# EAGLE board Control PCb (EAGLE 9.6.2)
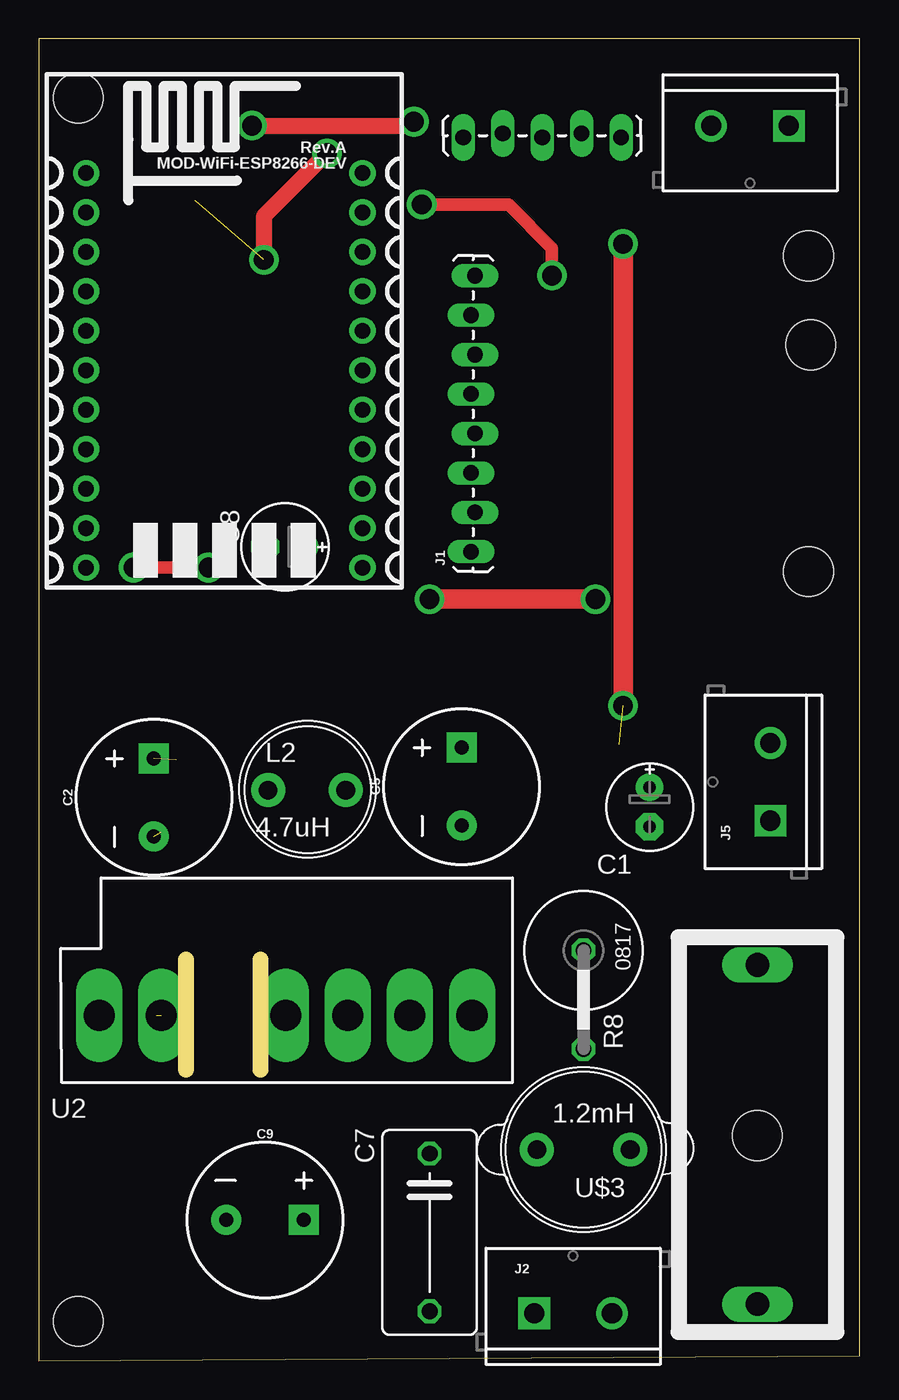
[diagram p0: board, top side]
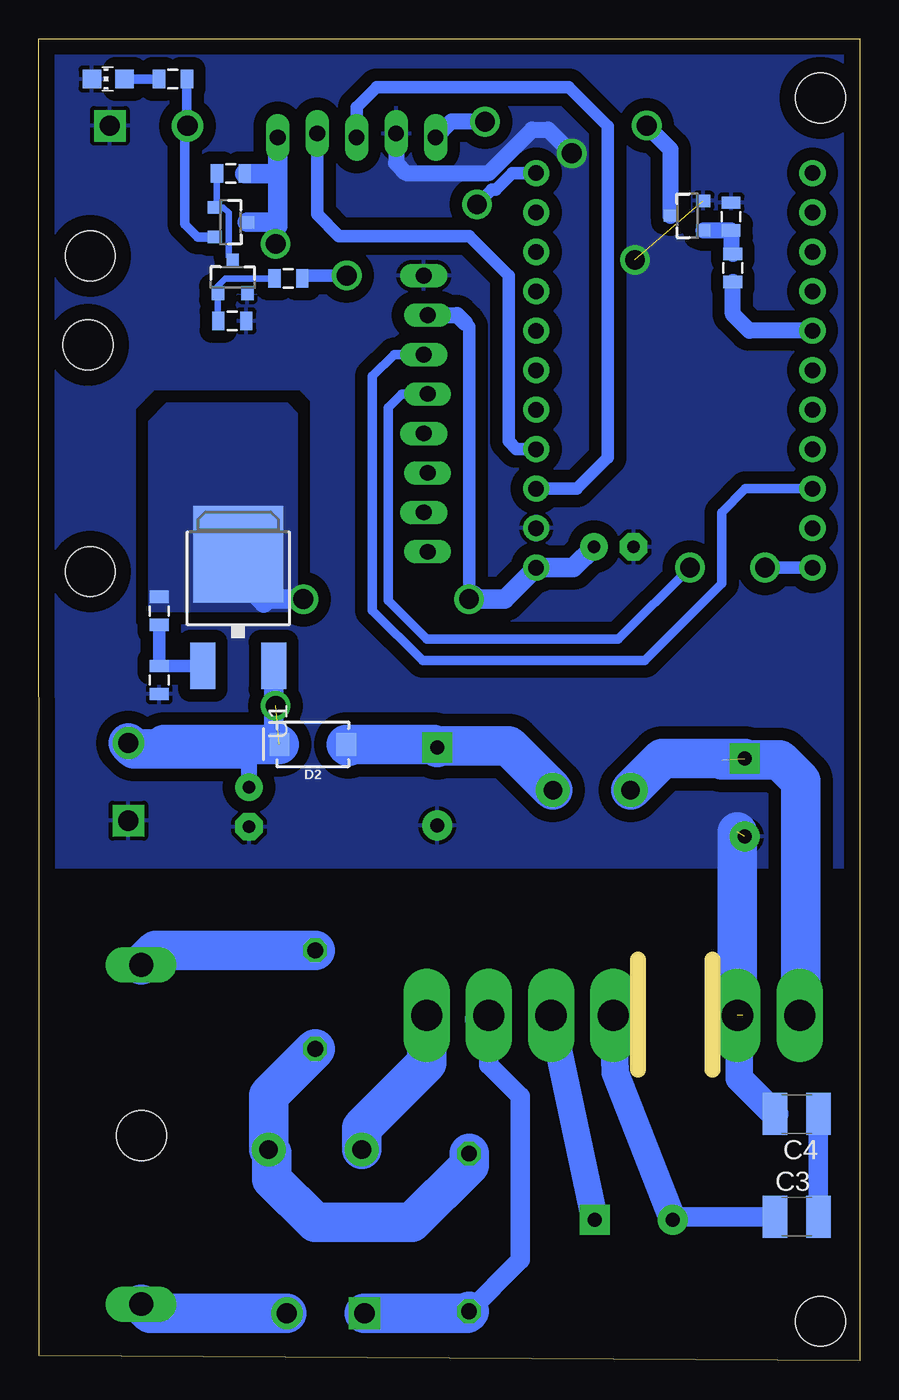
[diagram p1: board, bottom side, seen from below]

Size 52.83 x 85.09 mm. Coordinates in mm from the lower left corner, seen from the top.
Outline: 0,0 52.81,0.3 52.83,85.09 0,85.09 0,0
Copper layers (1*16): Top 0.035mm / dielectric 1.5mm / Bottom 0.035mm
Design rules "default": minimum track width 6mil, minimum drill 0.35mm, track to track 6mil, track to pad 6mil, pad to pad 6mil, via to via 6mil, smd to smd 6mil, copper to edge 40mil, drill to drill 6mil, minimum pad ring 10mil, minimum via ring 8mil, stop-mask expansion 4mil, vias tented up to drill 0mil, thermal gap 10mil
Holes 3.2 mm at 49.67,65.38 2.54,81.28 2.54,2.54 46.23,14.48 49.53,71.12 49.53,50.8

## Footprints (pad centres in the part's own frame; a part is rotated, then mirrored left to right if it is on the bottom)
E2,5-6E = drill 0.813 pad 1.778: + -1.27,0 | drill 0.813 pad 1.778 octagon: - 1.27,0
CPOL-RADIAL-5MM-10MM-KIT = drill 0.9 pad 1.93 square: + 2.5,0 | drill 0.9 pad 1.93: - -2.5,0
C1210 = smd 1.6 x 2.7: 1 -1.4,0; 2 1.4,0
C102-064X133 = drill 1.016 octagon: 1 -5.08,0; 2 5.08,0
CHIP_LED0805 = smd 1.2 x 1.2: A 0,-1.05; C 0,1.05
SMA-DIODE = smd 1.27 x 1.47: A -2.15,0; C 2.15,0
4527 = drill 1.524 long: 1 -10.922,0; 2 10.922,0
1X08_LOCK_LONGPADS = drill 1.016 long: 1 0,0.127; 2 2.54,-0.127; 3 5.08,0.127; 4 7.62,-0.127; 5 10.16,0.127; 6 12.7,-0.127; 7 15.24,0.127; 8 17.78,-0.127
SCREWTERMINAL-5MM-2 = drill 1.3 pad 2.032 square: 1 0,0 | drill 1.3 pad 2.032: 2 5,0
1X05_LOCK_LONGPADS = drill 1.016 long: 1 0,0; 2 2.54,-0.254; 3 5.08,0; 4 7.62,-0.254; 5 10.16,0
6000 = drill 1.2 pad 2.184: 1 -2.5,0; 2 2.5,0
SOT23 = smd 0.8 x 0.9: 1 -0.95,-1; 2 0.95,-1; 3 0,1.1
0805 = smd 0.8 x 1.2: 1 -0.9,0; 2 0.9,0
P0817V = drill 1.016 octagon: 1 -5.08,0; 2 1.27,0
V-REG_DPACK = smd 1.6 x 3: 1 -2.28,-4.8; 3 2.28,-4.8 | smd 5.8 x 6.2: 4 0,2.38
5ACFEW = drill 2 pad 2.5 long: 1 -12,0; 2 -8,0; 3 -4,0; 4 0,0; 5 8,0; 6 12,0
OLIMEX_MOD-WIFI-ESP8266-DEV-PINS-INSIDE = drill 1 pad 1.676: 1 2.54,0; 2 2.54,-2.54; 3 2.54,-5.08; 4 2.54,-7.62; 5 2.54,-10.16; 6 2.54,-12.7; 7 2.54,-15.24; 8 2.54,-17.78; 9 2.54,-20.32; 10 2.54,-22.86; 11 2.54,-25.4; 12 20.32,-25.4; 13 20.32,-22.86; 14 20.32,-20.32; 15 20.32,-17.78; 16 20.32,-15.24; 17 20.32,-12.7; 18 20.32,-10.16; 19 20.32,-7.62; 20 20.32,-5.08; 21 20.32,-2.54; 22 20.32,0
1800R = drill 1.2 pad 2.184: 1 -3,0; 2 3,0

## Placement (x,y rotation side)
C1  [E2,5-6E]  39.3,35.63 270 top
C2  470  [CPOL-RADIAL-5MM-10MM-KIT]  7.4,36.26 90 top
C3  [C1210]  4.06,9.27 0 bottom
C4  [C1210]  4.06,15.88 180 bottom
C5  100  [CPOL-RADIAL-5MM-10MM-KIT]  27.2,36.96 90 top
C7  0.1uF  [C102-064X133]  25.15,8.26 270 top
C8  [E2,5-6E]  15.84,52.39 180 top
C9  10uF  [CPOL-RADIAL-5MM-10MM-KIT]  14.55,9.06 0 top
D1  LED_GREEN  [CHIP_LED0805]  48.37,82.51 90 bottom
D2  3A/40V/500mV  [SMA-DIODE]  35.2,39.67 180 bottom
F1  4527  [4527]  46.25,14.56 90 top
J1  [1X08_LOCK_LONGPADS]  27.94,52.07 90 top
J2  [SCREWTERMINAL-5MM-2]  31.88,3.05 0 top
J3  [1X05_LOCK_LONGPADS]  37.47,78.74 180 top
J5  [SCREWTERMINAL-5MM-2]  47.07,34.76 90 top
J6  [SCREWTERMINAL-5MM-2]  48.27,79.49 180 top
L2  4.7uH  [6000]  17.25,36.73 0 top
Q1  DMP2305U-7  [SOT23]  40.51,73.28 270 bottom
Q2  BSS123  [SOT23]  40.36,69.72 0 bottom
Q3  BSS123  [SOT23]  11.08,73.71 90 bottom
R1  0  [0805]  36.78,69.67 180 bottom
R2  0  [0805]  40.48,76.42 0 bottom
R3  0  [0805]  44.21,82.51 0 bottom
R4  0  [0805]  8.18,70.34 90 bottom
R6  0  [0805]  45.09,43.81 90 bottom
R7  0  [0805]  45.09,48.26 90 bottom
R8  12/3W  [P0817V]  35.05,21.34 270 top
R9  0  [0805]  40.39,66.93 180 bottom
R10  0  [0805]  8.29,73.64 270 bottom
U1  V_REG_317DPACK  [V-REG_DPACK]  40.01,49.53 0 bottom
U2  5ACFEW  [5ACFEW]  15.88,22.23 180 top
U$1  [OLIMEX_MOD-WIFI-ESP8266-DEV-PINS-INSIDE]  23.37,51.05 180 top
U$3  1.2mH  [1800R]  35.05,13.59 180 top

## Library data of the parts
C1 C3 C4 C7 C8 L2 R8 U$3 = adafruit
C2 C5 C9 = SparkFun-Capacitors; PROD_ID: CAP-09538
D1 = RJC-2; PARTNO: LTST-S220GKT
D2 = SparkFun-DiscreteSemi; PROD_ID: DIO-09886
F1 U2 = RJC-2
J1 J3 = SparkFun-Connectors
J2 J5 J6 = SparkFun-Connectors; SF_SKU: PRT-08432
Q1 = RJC-2; PARTNO: DMP2305U-7
Q2 Q3 = RJC-2; PARTNO: BSS123,215
R1-R4 R6 R7 R9 R10 = RJC-2; PARTNO: RC0805JR-070RL
U1 = SparkFun-IC-Power; PROD_ID: IC-09888
U$1 = esp8266modules

## Nets
+3V3: C8.+ J1.7 R7.2 U1.4 U$1.1
+5V: C1.+ D2.C J3.1 J5.2 Q1.3 R2.2 U1.3
DISPLAY_RESET: J3.5 Q3.3
GND: C1.- C2.- C4.2 C5.- C8.- D1.C J1.8 J3.4 J5.1 J6.1 Q2.2 Q3.2 R6.1 R9.1 R10.1 U2.5 U$1.2
IO12: R4.1 U$1.16
N$1: D1.A R3.1
N$2: Q2.1 R1.2 R9.2
N$3: F1.1 J2.2
N$4: C7.2 J2.1 U2.2
N$5: Q1.1 Q2.3 R2.1
N$6: J6.2 Q1.2 R3.2
N$7: R1.1 U$1.11
N$8: Q3.1 R4.2 R10.2
N$9: R6.2 R7.1 U1.1
N$10: F1.2 R8.1
N$11: C7.1 R8.2 U$3.1
N$12: U2.1 U$3.2
N$13: C9.+ U2.3
N$14: C3.1 C9.- U2.4
N$15: C3.2 C4.1
N$17: C2.+ L2.1 U2.6
N$18: C5.+ D2.A L2.2
RX: J3.3 U$1.3
SCL: J1.5 U$1.22
SDA: J1.6 U$1.20
TX: J3.2 U$1.4

## Tracks (layer width: path | path; a pad name or v marks a point on that pad's centre or on a via)
+3V3  (via drill 1.27)
  Top 1.27: v25.15,49.02 v35.81,49.02
  Bottom 0.813: 25.4,66.8 25.15,66.55 v25.15,49.02
  Bottom 1.016: J1.7 25.91,67.31 25.4,66.8
  Bottom 1.27: v35.81,49.02 38.1,49.02 38.35,48.77 40.01,50.42 U1.4 | C8.+ 18.44,51.05 U$1.1 22.86,49.02 v25.15,49.02 24.89,49.28
  pour Bottom (no thermals): 44.62,61.59 45.76,60.46 45.76,48.26 36.83,48.26 36.2,48.89 36.2,60.96 36.83,61.59
+5V  (via drill 1.27)  (1 unrouted)
  Top 1.27: v37.59,71.88 v37.59,42.16
  Bottom 1.016: 39.85,39.37 39.3,38.82 C1.+ | 44.45,39.37 44.75,39.67
  Bottom 1.27: U1.3 37.73,40.05 D2.C | J3.1 37.47,76.45 | 37.47,76.45 37.47,73.03 | 37.47,73.03 37.59,72.9 v37.59,71.88 | Q1.3 37.72,73.28 37.47,73.03 | R2.2 37.49,76.42 37.47,76.45
  Bottom 2.54: D2.C 44.75,39.67 | 39.85,39.37 44.45,39.37 46.68,39.37 J5.2
DISPLAY_RESET  (via drill 1.27)
  Top 1.016: v13.72,79.5 23.88,79.5 v24.13,79.76
  Bottom 1.016: Q3.3 12.18,77.96 v13.72,79.5 | v24.13,79.76 26.29,79.76 J3.5
GND  (via drill 1.27)  (3 unrouted)
  Top 1.016: v18.54,77.72 14.48,73.66 v14.48,70.87
  Bottom 0.813: 7.54,21.52 7.54,22.23
  Bottom 1.016: J3.4 29.84,77.09 29.21,76.45 23.88,76.45 21.08,79.25 20.07,79.25 v18.54,77.72
  Bottom 1.778: 7.54,21.52 7.75,21.72 7.75,18.16 C4.2
  Bottom 2.54: U2.5 7.88,34.04
  pour Bottom (isolate 0.8, rank 6): 0,85.09 53.34,85.09 53.34,31.75 0,31.75
IO12
  Bottom 1.016: U$1.16 7.11,66.29 8.18,67.36 R4.1
N$1
  Bottom 0.61: R3.1 D1.A
N$2
  Bottom 0.406: R1.2 40.83,69.67 41.31,69.18 Q2.1 41.31,66.95 R9.2
N$3
  Bottom 2.54: J2.2 45.66,3.05 F1.1
N$4
  Bottom 1.27: U2.2 23.88,19.05 21.84,17.02 21.84,6.48 25.27,3.05
  Bottom 2.54: 24.13,21.97 U2.2 | C7.2 25.27,3.05 J2.1
N$5
  Bottom 0.406: R2.1 41.38,74.36 Q1.1 40.95,74.23 40.61,73.88 40.61,71.07 Q2.3
N$6
  Bottom 0.61: Q1.2 42.61,72.33 43.43,73.15 43.43,79.33 43.31,79.45 | 43.31,79.45 J6.2 | R3.2 43.31,79.45
N$7  (via drill 1.27)
  Top 0.813: v24.64,74.42 30.23,74.42 33.02,71.63 33.02,70.36 32.77,70.1 v33.02,69.85
  Bottom 0.813: U$1.11 22.37,76.45 23.43,75.39 23.67,75.39 v24.64,74.42 | v33.02,69.85 35.7,69.85 R1.1
N$8
  Bottom 1.016: R4.2 8.29,71.36 R10.2 8.3,72.76 Q3.1
N$9
  Bottom 0.813: U1.1 42.3,44.72 R6.2 R7.1
N$10
  Bottom 2.54: R8.1 45.31,26.42 F1.2
N$11
  Bottom 2.54: R8.2 38.05,17.07 U$3.1 37.85,13.38 37.85,11.68 35.05,8.89 28.83,8.89 25.15,12.57 C7.1
N$12
  Bottom 2.54: U$3.2 32.05,15 27.88,19.18 U2.1
N$13
  Bottom 1.778: U2.3 C9.+
N$14
  Bottom 1.27: U2.4 15.62,21.97 | C3.1 11.84,9.27 C9.-
  Bottom 1.778: U2.4 15.75,18.54 C9.-
N$15
  Bottom 1.27: C3.2 C4.1
N$17  (1 unrouted)
  Bottom 2.54: U2.6 3.81,22.29 3.81,37.31 5.16,38.66 8.84,38.66 | C2.+ 12.72,38.76 L2.1
N$18
  Bottom 2.54: 32.92,39.54 D2.A 27.41,39.67 C5.+ 27.1,39.56 22.58,39.56 L2.2
RX
  Bottom 0.813: J3.3 32.38,80.67 31.09,81.97 18.74,81.97 16.24,79.47 16.24,58.12 18.23,56.13 U$1.3
SCL  (via drill 1.27)
  Top 0.813: v6.1,51.05 v10.92,51.05
  Bottom 0.61: J1.5 29.46,62.23 30.35,61.34 30.35,48.94 27.86,46.44 15.53,46.44 v10.92,51.05
  Bottom 0.813: U$1.22 v6.1,51.05
SDA
  Bottom 0.61: U$1.20 7.37,56.13 8.89,54.61 8.89,50.04 13.85,45.07 28.14,45.07 31.37,48.3 31.37,63.37 29.97,64.77 J1.6
TX
  Bottom 0.813: U$1.4 22.1,58.67 22.61,59.18 22.61,69.85 25.15,72.39 33.53,72.39 34.92,73.79 J3.2